# Altium PCB Switch.PcbDoc
Units mil, origin at the board's own origin, x right, y up, seen from the top; angles counter-clockwise.
Board outline 6000 x 4000 mil, 2 copper layers (Top Layer, Bottom Layer); 7 components, 5 nets, 29 pads, 0 vias.
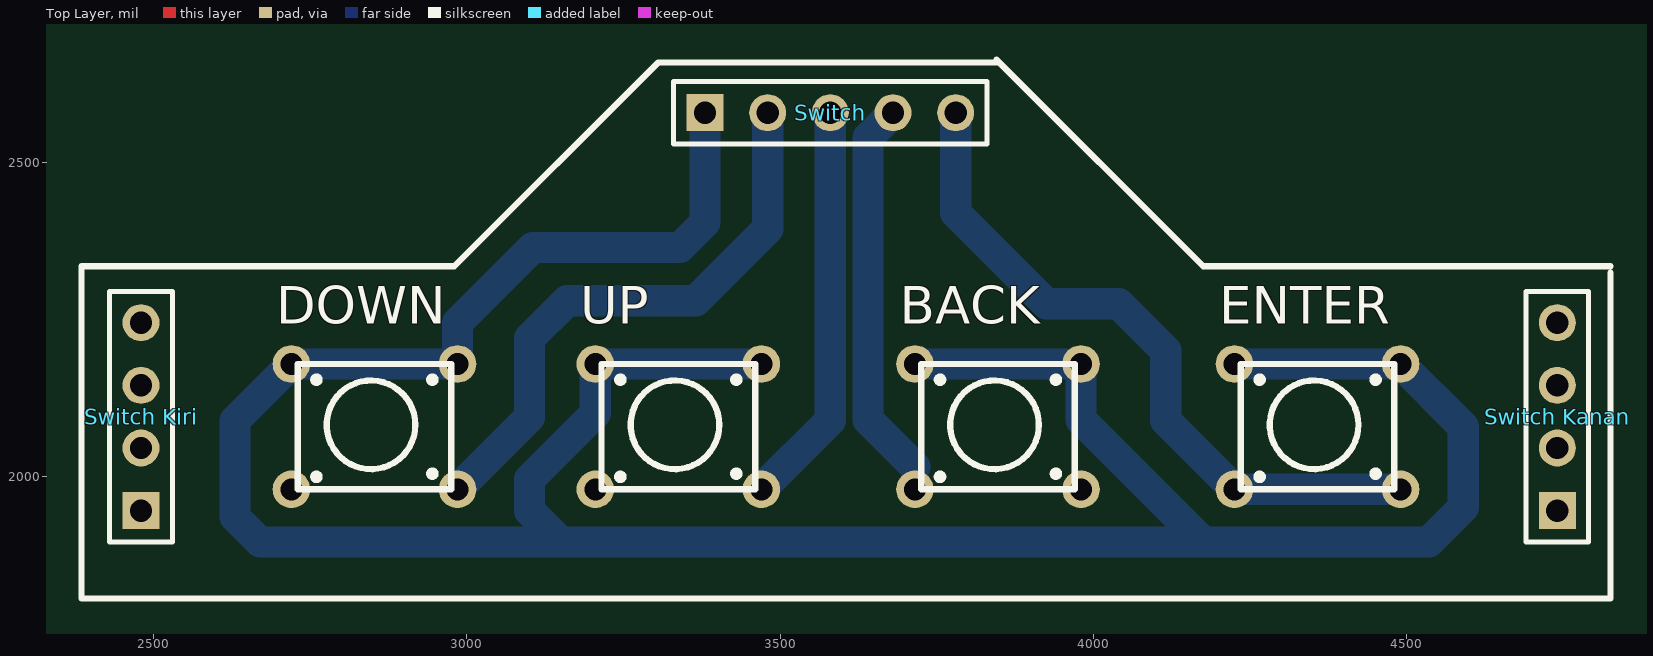
[diagram p0: Top Layer view]
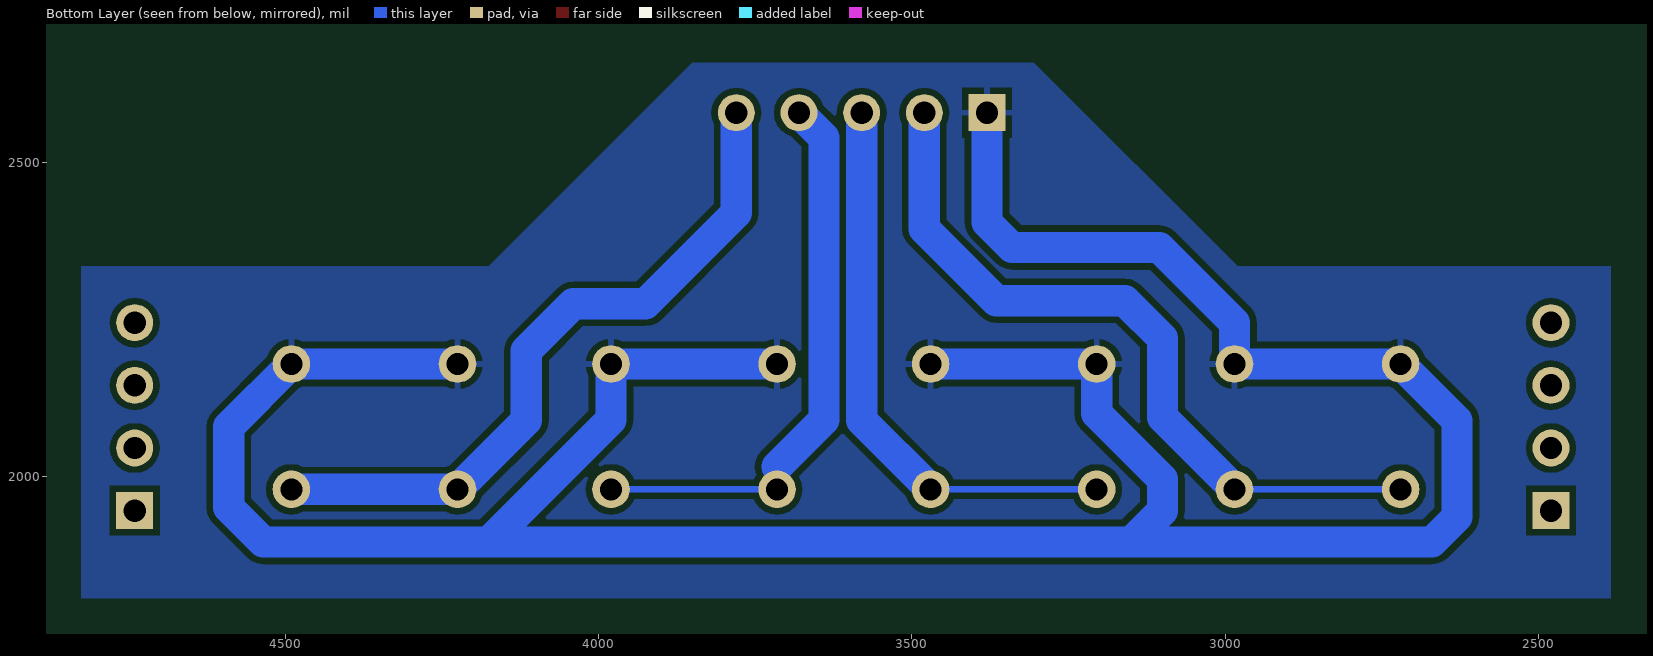
[diagram p1: Bottom Layer view, seen from below]

## Layer stack, top to bottom
Top Solder: solder mask 0.4, Solder Resist, Dk 3.5
Top Layer: signal copper 1.4
Dielectric 1: dielectric 12.6, FR-4, Dk 4.8
Bottom Layer: signal copper 1.4
Bottom Solder: solder mask 0.4, Solder Resist, Dk 3.5

## Board outline
1000,1000 7000,1000 7000,5000 1000,5000

## Design rules (kind name [scope] priority, off if disabled: settings)
Clearance [All] p1: gap=10
PolygonConnect [All] p1: connectstyle=Relief reliefconductorwidth=10 reliefentries=4 polygonreliefangle="90 Angle" airgapwidth=10
RoomDefinition Switch [InComponentClass('Switch')] p1: confinementstyle=ConfineIn formatcopy=TRUE lockcomponents=FALSE outline 2305,1785 4920,1785 4920,2735 2305,2735
RoutingLayers [OnLayer('Bottom Layer')] p1: top layer_v5=TRUE bottom layer_v5=TRUE
RoutingVias [All] p1: holewidth=28 width=50 viastyle="Through Hole" minholewidth=28 minwidth=50 maxholewidth=28 maxwidth=50
SolderMaskExpansion [All] p1: expansion=4
Width [All] p1: maxlimit=50 minlimit=10 preferedwidth=20
29 further rules are at their usual default settings.

## Classes and differential pairs
component class Switch: BACK DOWN ENTER "Switch Kanan" "Switch Kiri" UP

## Components (designator, comment, footprint, x,y, rotation, side; value= is the part's Value field where it differs from the comment)
BACK "pushbutton" pushbutton 4280,2080 r0 top (schematic designator S3)
DOWN "pushbutton" pushbutton 3285,2080 r0 top (schematic designator S1)
ENTER "pushbutton" pushbutton 4790,2080 r0 top (schematic designator S4)
Switch "Comment" HDR1X5 3380,2580 r0 top
"Switch Kanan" "Header 4" HDR1X4 4740,1945 r90 top
"Switch Kiri" "Header 4" HDR1X4 2480,1945 r90 top
UP "pushbutton" pushbutton 3770,2080 r0 top (schematic designator S2)

## Footprints (in the part's own frame and the unit in brackets; to place one, negate y for a bottom-side part, rotate by r counter-clockwise, add the part's x,y. Pads: shape width x height; smd on the part's side, far side on the other; paste and mask are expansions set on the pad)
HDR1X4 [mm] "Connector; Header; 4 Position"
  rect 1.5x1.5 hole 0.9: 1(0,0)
  round 1.5 hole 0.9: 2(2.54,0) 3(5.08,0) 4(7.62,0)
  silkscreen extent -1.27,-1.27 8.89,1.27
HDR1X5 [mm] "Connector; Header; 5 Position"
  rect 1.5x1.5 hole 0.9: 1(0,0)
  round 1.5 hole 0.9: 2(2.54,0) 3(5.08,0) 4(7.62,0) 5(10.16,0)
  silkscreen extent -1.27,-1.27 11.43,1.27
pushbutton [mil]
  round 60 hole 35: 1(-565,-101) 1(-300,-101) 2(-565,99) 2(-300,99)
  silkscreen extent -555,-101 -310,99

## Part data
"Switch Kanan" "Switch Kiri": "Header, 4-Pin"

## Nets (pads, with @x,y where several pads share a name; then routed paths per layer and width w, separated by ;. In a path a pad name is that pad's centre, name@x,y a point inside that pad or via, vN(x,y) a via of type N, cw(c..) or ccw(c..) an arc to the next point about the centre after c; other vN are vias at no path point)
GND: BACK.2 DOWN.2 ENTER.2 Switch.1 UP.2 | length 5026.3
  Bottom Layer w50: Switch.1 3380,2405 3340,2365 3105,2365 2985,2245 2985,2179 2720,2179 2630,2089 2630,1935 2670,1895 3150,1895 ; UP.2@3470,2179 3205,2179 3205,2100 3100,1995 3100,1945 3150,1895 ; BACK.2@3715,2179 3980,2179 3980,2090 4175,1895 ; ENTER.2@4225,2179 4490,2179 4590,2079 4590,1950 4535,1895 4175,1895 ; 3150,1895 4175,1895
NetS1_1: DOWN.1 Switch.2 | length 1191.1
  Bottom Layer w10: DOWN.1@2720,1979 DOWN.1@2985,1979
  Bottom Layer w50: DOWN.1@2985,1979 3100,2094 3100,2220 3160,2280 3365,2280 3480,2395 Switch.2
NetS2_1: Switch.3 UP.1 | length 911.6
  Bottom Layer w10: UP.1@3205,1979 UP.1@3470,1979
  Bottom Layer w50: UP.1@3470,1979 3580,2089 Switch.3
NetS3_1: BACK.1 Switch.4 | length 913.6
  Bottom Layer w10: 3715,2015 3715,1979 BACK.1@3980,1979
  Bottom Layer w50: Switch.4 3640,2540 3640,2090 3715,2015
NetS4_1: ENTER.1 Switch.5 | length 1117.7
  Bottom Layer w50: Switch.5 3780,2420 3925,2275 4040,2275 4115,2200 4115,2089 4225,1979 ENTER.1@4490,1979
pads on no net: "Switch Kanan.1" "Switch Kanan.2" "Switch Kanan.3" "Switch Kanan.4" "Switch Kiri.1" "Switch Kiri.2" "Switch Kiri.3" "Switch Kiri.4"

## Polygon pours and split planes (outlines as drawn)
GND on Bottom Layer "Bottom Layer-No Net" (solid, pour order 1): 3305,2660 2980,2335 2385,2335 2385,1805 4825,1805 4825,2335 4175,2335 4155,2355 3850,2660 3305,2660

## Silkscreen, mask and mechanical layers (free items; w line width, h text height)
Top Overlay:
  lines w10: 3845,2665 4175,2335 4825,2335 ; 3855,2655 3850,2660 3305,2660 2980,2335 2385,2335 2385,1805 4825,1805 4825,2325